# EAGLE board led2 (EAGLE 7.5.0)
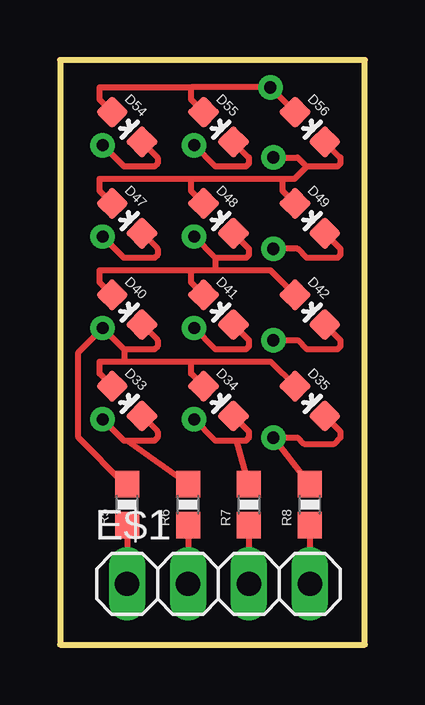
[diagram p0: board, top side]
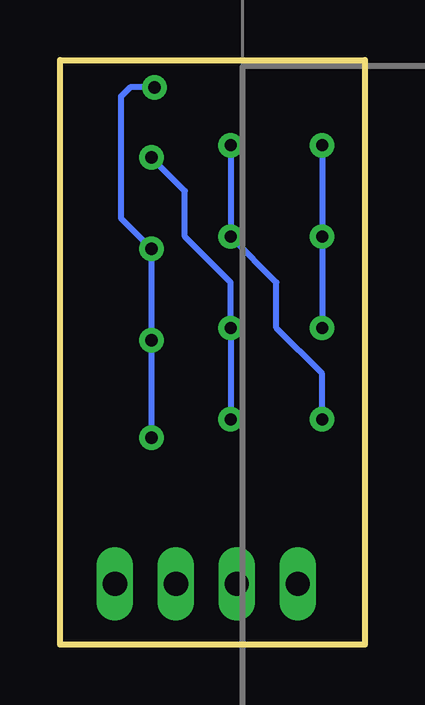
[diagram p1: board, bottom side, seen from below]

Size 12.7 x 24.38 mm. Coordinates in mm from the lower left corner, seen from the top.
Outline: 0,24.38 0,0 12.7,0 12.7,24.38 0,24.38
Copper layers (1*16): Top 0.035mm / dielectric 1.5mm / Bottom 0.035mm
Design rules "SparkFun-2-layer-STANDARD": minimum track width 10mil, minimum drill 20mil, track to track 10mil, track to pad 8mil, pad to pad 8mil, via to via 10mil, smd to smd 8mil, copper to edge 8mil, drill to drill 8mil, minimum pad ring 10mil, minimum via ring 10mil, stop-mask expansion 4mil, vias tented up to drill 20mil, thermal gap 10mil

## Footprints (pad centres in the part's own frame; a part is rotated, then mirrored left to right if it is on the bottom)
LED-0603 = smd 1 x 1: A 0,-0.877; C 0,0.877
1X04 = drill 1.016 long: 1 -3.81,0; 2 -1.27,0; 3 1.27,0; 4 3.81,0
0603-RES = smd 1.1 x 1: 1 -0.85,0; 2 0.85,0

## Placement (x,y rotation side)
D33  RED  [LED-0603]  2.79,10.16 225 top
D34  RED  [LED-0603]  6.6,10.16 225 top
D35  RED  [LED-0603]  10.41,10.16 225 top
D40  RED  [LED-0603]  2.79,13.97 225 top
D41  RED  [LED-0603]  6.6,13.97 225 top
D42  RED  [LED-0603]  10.41,13.97 225 top
D47  RED  [LED-0603]  2.79,17.78 225 top
D48  RED  [LED-0603]  6.6,17.78 225 top
D49  RED  [LED-0603]  10.41,17.78 225 top
D54  RED  [LED-0603]  2.79,21.59 225 top
D55  RED  [LED-0603]  6.6,21.59 225 top
D56  RED  [LED-0603]  10.41,21.59 225 top
E$1  [1X04]  6.6,2.54 0 top
FRAME1  FRAME-LETTER  [CREATIVE_COMMONS]  -34.04,-35.56 0 top  (outside the outline)
R5  82  [0603-RES]  2.79,5.84 90 top
R6  82  [0603-RES]  5.33,5.84 90 top
R7  82  [0603-RES]  7.87,5.84 90 top
R8  82  [0603-RES]  10.41,5.84 90 top

## Library data of the parts
D33-D35 D40-D42 D47-D49 D54-D56 = SparkFun-LED; PROD_ID: DIO-00819
E$1 = pinhead
FRAME1 = SparkFun-Aesthetics
R5-R8 = SparkFun-Resistors; PROD_ID: RES-12311; VALUE: 820K

## Nets
P5: D33.A D34.A D35.A D40.C D47.C D54.C R5.2
P6: D33.C D40.A D41.A D42.A D48.C D55.C R6.2
P7: D34.C D41.C D47.A D48.A D49.A D56.C R7.2
P8: D35.C D42.C D49.C D54.A D55.A D56.A R8.2
S$1: E$1.1 R5.1
S$2: E$1.2 R6.1
S$3: E$1.3 R7.1
S$4: E$1.4 R8.1

## Tracks (layer width: path | path; a pad name or v marks a point on that pad's centre or on a via)
P5  (via drill 0.51)
  Top 0.254: 2.67,11.81 1.65,11.81 1.65,11.3 D33.A | 2.67,11.81 5.46,11.81 | 5.46,11.81 8.76,11.81 D35.A | D33.A | D34.A | D34.A 5.46,11.3 5.46,11.81 | D40.C | D40.C 4.06,12.7 4.06,12.45 3.94,12.32 2.67,12.32 | D47.C | D47.C 4.06,16.51 4.06,16.26 3.94,16.13 2.67,16.13 v1.78,17.02 | D54.C | D54.C 4.06,20.32 4.06,20.07 3.94,19.94 2.67,19.94 v1.78,20.83 | 2.67,12.32 v1.78,13.21 0.76,12.19 0.76,8.64 2.71,6.69 R5.2 | 2.67,12.32 2.67,11.81
  Bottom 0.254: v1.78,20.83 v1.78,17.02 v1.78,13.21
P6  (via drill 0.51)
  Top 0.254: 5.46,15.62 1.65,15.62 1.65,15.11 D40.A | 5.46,15.62 6.48,15.62 | 6.48,15.62 8.76,15.62 D42.A | D40.A | D41.A | D41.A 5.46,15.11 5.46,15.62 | D33.C | D33.C 4.06,8.89 4.06,8.64 3.94,8.51 2.79,8.51 | 2.79,8.51 2.67,8.51 v1.78,9.4 | D48.C | D48.C 7.87,16.51 7.87,16.26 7.75,16.13 6.48,16.13 | D55.C | D55.C 7.87,20.32 7.87,20.07 7.75,19.94 6.48,19.94 v5.59,20.83 | 6.48,16.13 v5.59,17.02 | 6.48,16.13 6.48,15.62 | R6.2 2.79,8.51
  Bottom 0.254: v5.59,20.83 v5.59,17.02 3.68,15.11 3.68,13.21 1.78,11.3 v1.78,9.4
P7  (via drill 0.51)
  Top 0.254: 5.46,19.43 1.65,19.43 1.65,18.92 D47.A | 5.46,19.43 9.27,19.43 | 9.27,19.43 9.78,19.43 10.29,19.94 | D47.A | D48.A | D48.A 5.46,18.92 5.46,19.43 | D34.C | D34.C 7.87,8.89 7.87,8.64 7.75,8.51 7.37,8.51 | 7.37,8.51 6.48,8.51 v5.59,9.4 | D41.C | D41.C 7.87,12.7 7.87,12.45 7.75,12.32 6.48,12.32 v5.59,13.21 | D56.C | D56.C 11.68,20.32 11.68,20.07 11.56,19.94 10.29,19.94 | D49.A | D49.A 9.27,18.92 9.27,19.43 | 10.29,19.94 9.91,20.32 v8.89,20.32 | R7.2 7.37,8.51
  Bottom 0.254: v5.59,9.4 v5.59,13.21 5.59,15.11 7.49,17.02 7.49,18.92 v8.89,20.32
P8  (via drill 0.51)
  Top 0.254: 5.46,23.24 1.65,23.24 1.65,22.73 D54.A | D54.A | D55.A | D55.A 5.46,22.73 5.46,23.24 | D35.C | D35.C 11.68,8.89 11.68,8.64 11.43,8.38 10.16,8.38 9.91,8.64 v8.89,8.64 R8.2 | D42.C | D42.C 11.68,12.7 11.68,12.45 11.56,12.32 10.29,12.32 9.91,12.7 v8.89,12.7 | D49.C | D49.C 11.68,16.51 11.68,16.26 11.56,16.13 10.29,16.13 9.91,16.51 v8.89,16.51 | 5.46,23.24 v8.76,23.24 D56.A | D56.A
  Bottom 0.254: v8.89,8.64 v8.89,12.7 v8.89,16.51 10.16,17.78 10.16,22.86 9.78,23.24 v8.76,23.24
S$1
  Top 0.254: R5.1 E$1.1
S$2
  Top 0.254: R6.1 E$1.2
S$3
  Top 0.254: R7.1 E$1.3
S$4
  Top 0.254: R8.1 E$1.4

## Text on the board
Measures: 0.13
tDocu: Shawn Hymel